# EAGLE board xplorer_b (EAGLE 6.3)
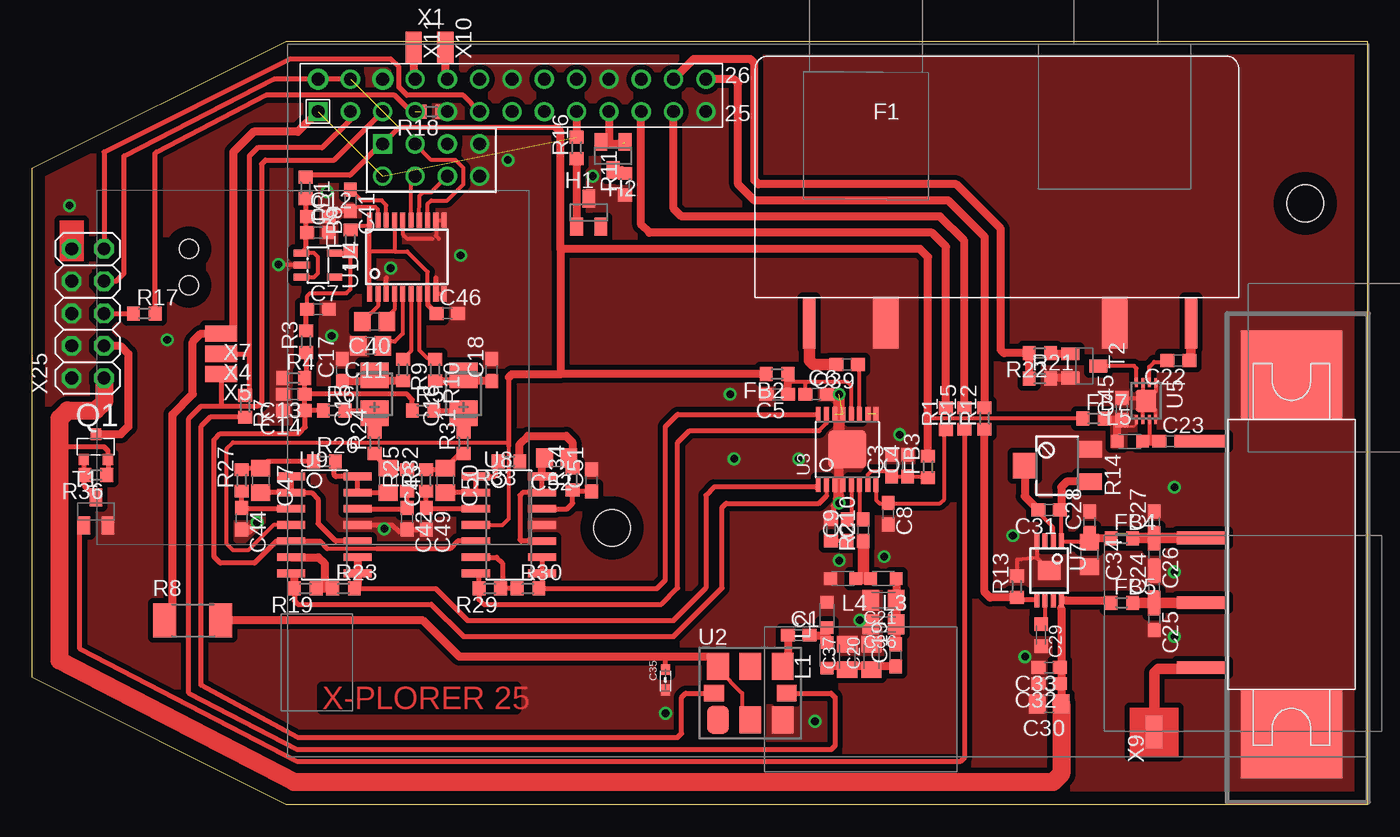
[diagram p0: board, top side]
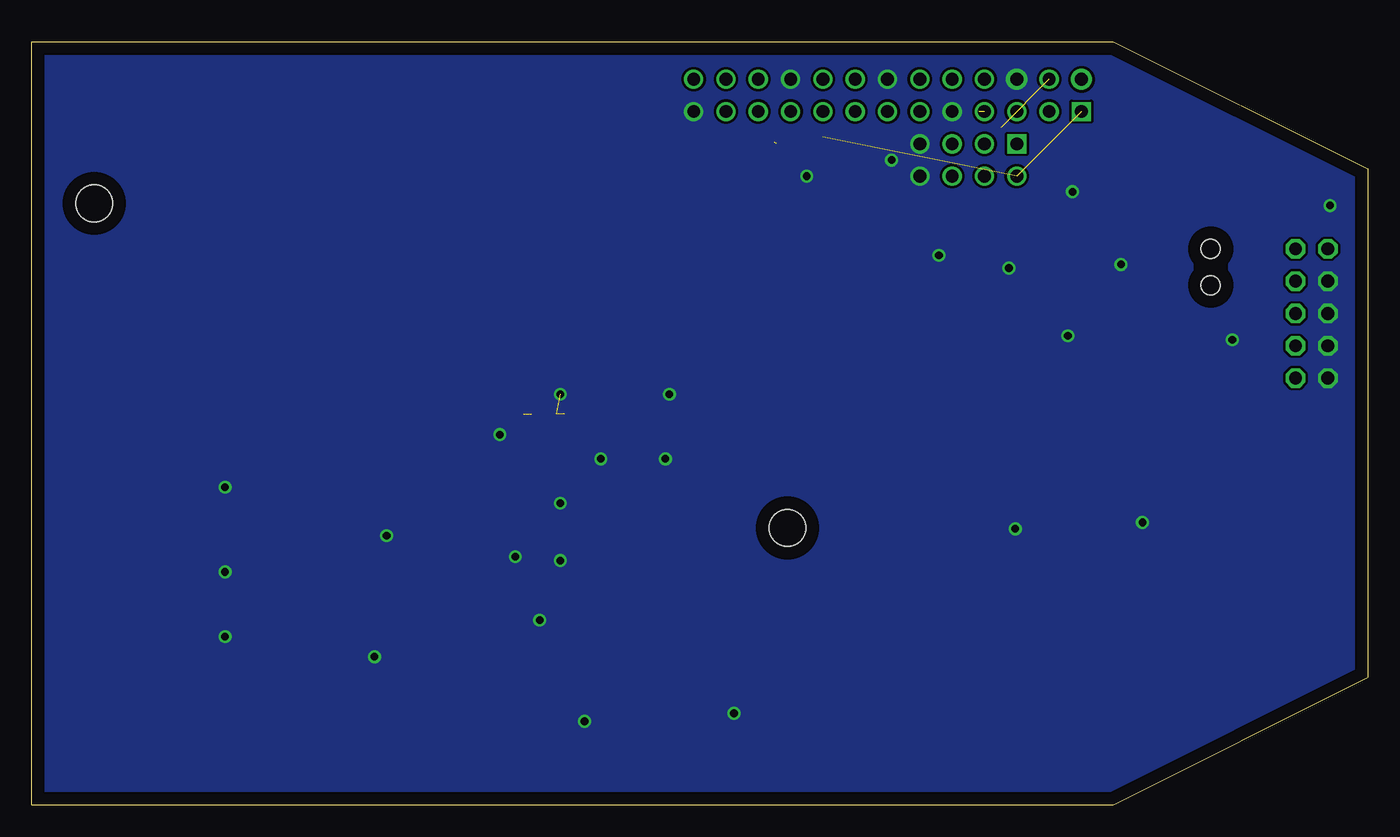
[diagram p1: board, bottom side, seen from below]

Size 105 x 60 mm. Coordinates in mm from the lower left corner, seen from the top.
Outline: 105,0 105,60 20,60 0,50 0,10 20,0 105,0
Copper layers (1*16): Top 0.035mm / dielectric 1.5mm / Bottom 0.035mm
Design rules "default": minimum track width 10mil, minimum drill 24mil, track to track 8mil, track to pad 8mil, pad to pad 8mil, via to via 8mil, smd to smd 8mil, copper to edge 40mil, drill to drill 8mil, minimum pad ring 10mil, minimum via ring 8mil, stop-mask expansion 4mil, vias tented up to drill 0mil, thermal gap 10mil
Holes 1.5 mm at 12.34,43.7 12.34,40.85

## Footprints (pad centres in the part's own frame; a part is rotated, then mirrored left to right if it is on the bottom)
C0603 = smd 1.1 x 1: 1 -0.85,0; 2 0.85,0
C0805 = smd 1.3 x 1.5: 1 -0.95,0; 2 0.95,0
CT3528 = smd 2 x 2.2: + -1.5,0; - 1.5,0
C0805K = smd 1.3 x 1.6: 1 -1,0; 2 1,0
C0603K = smd 1.05 x 1.08: 1 -0.875,0; 2 0.875,0
0603 = smd 0.85 x 0.7: 1 -0.9,0; 2 0.7,0
CBT13 = smd 4 x 1: A1 2,-15; A2 2,15 | smd 4 x 2: G0 2,-9; G1 2,9
R0603 = smd 1 x 1.1: 1 -0.85,0; 2 0.85,0
SOT23 = smd 1 x 1.4: 1 -0.95,-1.1; 2 0.95,-1.1; 3 0,1.1
L2012C = smd 1 x 1: 1 -1,0; 2 1,0
MICRO3 = smd 0.8 x 0.9: 1 -0.95,-1; 2 0.95,-1; 3 0,1
R2010 = smd 1.8 x 2.7: 1 -2.2,0; 2 2.2,0
SM-42/43X = smd 1.3 x 1.9: 1 -1.27,-2.55; 3 1.27,-2.55 | smd 2 x 1.9: 2 0,2.55
SOT23-BEC = smd 1 x 1.4: B -0.95,-1.1; C 0,1.1; E 0.95,-1.1
PW_R-PDSO-G20 = smd 0.4 x 1.2: 1 -2.925,-2.9; 2 -2.275,-2.9; 3 -1.625,-2.9; 4 -0.975,-2.9; 5 -0.325,-2.9; 6 0.325,-2.9; 7 0.975,-2.9; 8 1.625,-2.9; 9 2.275,-2.9; 10 2.925,-2.9; 11 2.925,2.9; 12 2.275,2.9; 13 1.625,2.9; 14 0.975,2.9; 15 0.325,2.9; 16 -0.325,2.9; 17 -0.975,2.9; 18 -1.625,2.9; 19 -2.275,2.9; 20 -2.925,2.9
8-PIN = smd 1.7 x 2.15: 1 -2.54,-2.1; 2 0,-2.1; 3 2.54,-2.1; 4 2.54,2.1; 5 0,2.1; 6 -2.54,2.1 | smd 1.545 x 1.3: 7 -2.853,0; 8 2.853,0
TSSOP16EXP = smd 0.381 x 1.143: 1 -2.275,-2.768; 2 -1.625,-2.768; 3 -0.975,-2.768; 4 -0.325,-2.768; 5 0.325,-2.768; 6 0.975,-2.768; 7 1.625,-2.768; 8 2.275,-2.768; 9 2.275,2.768; 10 1.625,2.768; 11 0.975,2.768; 12 0.325,2.768; 13 -0.325,2.768; 14 -0.975,2.768; 15 -1.625,2.768; 16 -2.275,2.768 | smd 3 x 3: EXP 0,0
SOT23-5 = smd 0.55 x 1.2: 1 -0.95,-1.3; 2 0,-1.3; 3 0.95,-1.3; 4 0.95,1.3; 5 -0.95,1.3
TDFN8-2X3MM = smd 0.7 x 0.3: 1 -1.45,0.75; 2 -1.45,0.25; 3 -1.45,-0.25; 4 -1.45,-0.75; 5 1.45,-0.75; 6 1.45,-0.25; 7 1.45,0.25; 8 1.45,0.75 | smd 1.74 x 1.63: EP 0,0
RA08H1317M = smd 7 x 8: G1 -14.1,0; G2 14.1,0 | smd 1 x 4: IN -8.9,-7; OUT 8.9,-7; VDD 3.8,-7; VGG -1.3,-7
PW_R-PDSO-G08 = smd 0.4 x 1.2: 1 -0.975,-2.3; 2 -0.325,-2.3; 3 0.325,-2.3; 4 0.975,-2.3; 5 0.975,2.3; 6 0.325,2.3; 7 -0.325,2.3; 8 -0.975,2.3 | smd 1.8 x 1.5: EP 0,0
SO14 = smd 0.61 x 2.21: 1 -3.81,-2.603; 2 -2.54,-2.603; 3 -1.27,-2.603; 4 0,-2.603; 5 1.27,-2.603; 6 2.54,-2.603; 7 3.81,-2.603; 8 3.81,2.603; 9 2.54,2.603; 10 1.27,2.603; 11 0,2.603; 12 -1.27,2.603; 13 -2.54,2.603; 14 -3.81,2.603
RASPBERRY-PI_REV2 = drill 1 square: P1_1 0,0; P5_1 5.08,-2.54 | drill 1 pad 1.676: P1_2 0,2.54; P1_6 5.08,2.54 | drill 1: P1_3 2.54,0; P1_4 2.54,2.54; P1_5 5.08,0; P1_7 7.62,0; P1_8 7.62,2.54; P1_9 10.16,0; P1_10 10.16,2.54; P1_11 12.7,0; P1_12 12.7,2.54; P1_13 15.24,0; P1_14 15.24,2.54; P1_15 17.78,0; P1_16 17.78,2.54; P1_17 20.32,0; P1_18 20.32,2.54; P1_19 22.86,0; P1_20 22.86,2.54; P1_21 25.4,0; P1_22 25.4,2.54; P1_23 27.94,0; P1_24 27.94,2.54; P1_25 30.48,0; P1_26 30.48,2.54; P5_2 5.08,-5.08; P5_3 7.62,-2.54; P5_4 7.62,-5.08; P5_5 10.16,-2.54; P5_6 10.16,-5.08; P5_7 12.7,-2.54; P5_8 12.7,-5.08 | hole 2.9: 77.6,-7.225; 23.1,-32.725
SMD1,27-2,54 = smd 1.27 x 2.54: 1 0,0
2X05 = drill 1.016 octagon: 1 -5.08,-1.27; 2 -5.08,1.27; 3 -2.54,-1.27; 4 -2.54,1.27; 5 0,-1.27; 6 0,1.27; 7 2.54,-1.27; 8 2.54,1.27; 9 5.08,-1.27; 10 5.08,1.27

## Placement (x,y rotation side)
C1  10n  [C0603]  60.27,13.34 0 top
C2  100n  [C0603]  22.5,44.98 0 top
C3  10n  [C0603]  67.58,26.67 90 top
C4  100p  [C0603]  68.85,26.67 90 top
C5  10n  [C0603]  58.59,32.27 180 top
C6  100p  [C0603]  61.66,32.28 0 top
C7  100n  [C0603]  22.5,38.94 0 top
C8  100n  [C0603]  67.31,22.88 270 top
C9  10n  [C0603]  64.09,21.59 90 top
C10  10n  [C0603]  65.35,21.59 90 top
C11  10u  [C0805]  26.63,36.09 180 top
C12  1u  [C0603]  22.5,46.24 0 top
C13  100n  [C0603]  20.59,32.27 180 top
C14  10u  [C0603]  20.59,31 180 top
C15  1u  [CT3528]  26.95,32.27 90 top
C16  1u  [CT3528]  33.93,32.27 90 top
C17  10n  [C0603]  24.41,34.18 90 top
C18  10n  [C0603]  36.15,34.18 90 top
C19  4p7  [C0603]  67.9,11.75 90 top
C20  47p  [C0805K]  66,11.64 90 top
C21  47p  [C0805K]  66.95,16.08 180 top
C22  10n  [C0603]  90.12,34.92 180 top
C23  10n  [C0603]  89.48,28.57 0 top
C24  100p  [C0603]  88.22,17.15 90 top
C25  10n  [C0603]  88.22,14.6 270 top
C26  100p  [C0603]  88.22,19.69 270 top
C27  10n  [C0603]  88.22,22.23 90 top
C28  100n  [C0603]  83.13,22.23 90 top
C29  10n  [C0603K]  79.33,13.34 270 top
C30  10u  [C0805]  79.96,7.94 180 top
C31  10n  [C0603]  79.96,23.18 180 top
C32  100n  [C0603]  79.96,9.52 180 top
C33  100p  [C0603]  79.96,10.8 180 top
C34  10u  [C0805]  83.13,19.69 270 top
C35  100n  [0603]  49.8,9.73 270 top
C36  8p  [C0805K]  66.95,14.18 180 top
C37  8p  [C0805K]  64.09,11.64 90 top
C39  10n  [C0603]  64.09,34.61 180 top
C40  10u  [C0805]  26.95,37.99 180 top
C41  100n  [C0603]  25.04,47.52 270 top
C42  100p  [C0603]  29.5,22.5 270 top
C43  200p  [C0805]  28,25.5 270 top
C44  100p  [C0603]  16.5,22.5 270 top
C45  100n  [C0603]  85.67,31.11 90 top
C46  100n  [C0603]  32.66,38.62 0 top
C47  200p  [C0805]  18,25.5 270 top
C49  100p  [C0603]  31,22.5 270 top
C50  200p  [C0805]  32.5,25.5 270 top
C51  100p  [C0603]  44,25.5 90 top
C52  200p  [C0805]  41.25,27.25 180 top
F1  HELIX  [CBT13]  76.11,39.87 270 top
FB1  [R0603]  21.52,48.5 270 top
FB2  [R0603]  58.59,33.86 180 top
FB3  [R0603]  70.44,26.56 90 top
FB4  [R0603]  85.67,20.95 0 top
FB5  [R0603]  85.67,15.88 0 top
FB7  [R0603]  83.46,30.37 0 top
FB8  [R0603]  25.04,44.34 90 top
H1  [SOT23]  43.77,46.56 0 top
H2  [SOT23]  45.68,51.01 180 top
L1  15n  [L2012C]  62.5,11.75 90 top
L2  9n1  [L2012C]  62.5,14.92 90 top
L3  15n  [L2012C]  66.94,17.78 180 top
L4  9n1  [L2012C]  63.77,17.78 180 top
L5  220n  [L2012C]  86.31,28.57 0 top
Q1  IRLML6402  [MICRO3]  5.04,28.15 0 top
R1  1k  [R0603]  71.86,30.35 90 top
R2  50R  [R0603]  62.81,21.59 270 top
R3  10k  [R0603]  21.55,36.4 90 top
R4  2k7  [R0603]  20.59,33.55 0 top
R5  10k  [R0603]  30.76,31 0 top
R6  10k  [R0603]  23.77,31 0 top
R7  [R0603]  16.79,31.32 270 top
R8  [R2010]  12.66,14.49 0 top
R9  475R  [R0603]  29.17,34.18 270 top
R10  475R  [R0603]  31.71,34.18 270 top
R11  475R  [R0603]  46.63,48.78 90 top
R12  [R0603]  74.89,30.37 90 top
R13  10k  [R0603]  77.42,17.15 90 top
R14  [SM-42/43X]  80.59,26.67 90 top
R15  8k8  [R0603]  73.3,30.37 90 top
R16  475R  [R0603]  42.82,51.64 90 top
R17  475R  [R0603]  8.85,38.62 0 top
R18  1k  [R0603]  31.39,54.5 180 top
R19  10k  [R0603]  21.5,17 180 top
R21  47k  [R0603]  79.23,33.5 0 top
R22  10k  [R0603]  79.23,35.5 180 top
R23  10k  [R0603]  24.5,17 0 top
R24  47k  [R0603]  26.95,28.46 90 top
R25  47k  [R0603]  29.5,25.5 90 top
R26  47k  [R0603]  23,27 0 top
R27  47k  [R0603]  16.5,25.5 90 top
R29  10k  [R0603]  36,17 180 top
R30  10k  [R0603]  39,17 0 top
R31  47k  [R0603]  33.93,28.46 90 top
R32  47k  [R0603]  31,25.5 90 top
R33  47k  [R0603]  37.5,27 180 top
R34  47k  [R0603]  42.5,25.61 90 top
R36  47k  [R0603]  5.04,25.93 180 top
T1  [SOT23-BEC]  5.04,23.07 0 top
T2  BC817  [SOT23-BEC]  82.73,34.5 270 top
U1  PCM5102APW  [PW_R-PDSO-G20]  29.48,43.07 0 top
U2  SI570  [8-PIN]  56.47,8.78 0 top
U3  AD8345  [TSSOP16EXP]  64.09,27.94 0 top
U4  MIC5233  [SOT23-5]  22.5,42.44 270 top
U5  MAX2614  [TDFN8-2X3MM]  87.58,31.75 270 top
U6  RA08H1317M  [RA08H1317M]  99.01,19.69 270 top
U7  TPS7A4901  [PW_R-PDSO-G08]  79.96,18.41 180 top
U8  MAX4478  [SO14]  37.5,22 270 top
U9  MAX4478  [SO14]  23,22 270 top
X1  RASPBERRY-PI_REV2  [RASPBERRY-PI_REV2]  22.5,54.5 0 top
X4  [SMD1,27-2,54]  14.88,35.45 90 top
X5  [SMD1,27-2,54]  14.88,33.86 90 top
X7  [SMD1,27-2,54]  14.88,37.04 90 top
X9  [SMD1,27-2,54]  88.22,5.72 0 top
X10  [SMD1,27-2,54]  32.5,59.5 180 top
X11  [SMD1,27-2,54]  30,59.5 180 top
X25  [2X05]  4.4,38.62 90 top

## Library data of the parts
C1-C34 C36 C37 C39-C47 C49-C52 L1-L5 R1-R13 R15-R19 R21-R27 R29-R34 R36 = rcl
C35 = RC
F1 = 272MT-1008A
FB1-FB5 FB7 FB8 = FB
H1 H2 = led
Q1 = transistor-power
R14 = pot
T1 = transistor
T2 = transistor-npn
U1 = PCM5102A
U2 = silabs; OC_FARNELL: unknown; OC_NEWARK: unknown
U3 = AD8345
U4 = v-reg-micrel; OC_FARNELL: unknown; OC_NEWARK: unknown
U5 = MAX2615
U6 = RA08H1317M
U7 = TPS7A4901
U8 U9 = burr-brown; MF: TEXAS INSTRUMENTS; MPN: OPA4132UA; OC_FARNELL: 1212302; OC_NEWARK: 80K6028
X1 = RaspberryPi_v2
X4 X5 X7 X9-X11 = wirepad
X25 = pinhead

## Nets
12V_F: C2.1 C12.1 FB1.2 U4.1 U4.3
$2345: C16.+ R5.2 R31.2
$123456: C15.+ R6.2 R24.2
+3V3: R8.1 R16.2 X1.P1_1 X1.P1_17 X1.P5_2 X7.1
+3V3_PCM: C46.1 FB8.2 U1.1 U1.8 U1.17 U1.20
+3V3A: C7.1 FB8.1 R3.2 U4.5
+5V: FB1.1 FB2.2 FB3.2 FB7.1 U8.4 U9.4 X1.P1_2 X1.P1_4 X1.P5_1 X25.7
+5V_MAX: C45.1 FB7.2 L5.1 U5.5
+12V: C30.1 C32.1 C33.1 FB5.1 Q1.2 R36.1 U7.8 X25.1
BB_I+: R23.2 U3.1 U9.8 U9.9
BB_I-: R19.2 U3.2 U9.7
BB_Q+: R30.2 U3.16 U8.8 U8.9
BB_Q-: R29.2 U3.15 U8.7
CLEAN_LO: C10.1 L3.2 L4.1
GND: C2.2 C3.2 C4.2 C5.2 C6.2 C7.2 C8.2 C11.2 C12.2 C13.2 C14.2 C17.2 C18.2 C20.2 C21.2 C24.2 C25.2 C26.2 C27.2 C28.2 C29.2 C30.2 C32.2 C33.2 C34.2 C35.2 C36.2 C37.2 C41.2 C42.2 C44.2 C45.2 C46.2 C49.2 C51.2 F1.G0 F1.G1 H1.3 L2.2 L4.2 R2.1 R4.1 R11.1 R13.2 R14.3 R18.1 R21.2 T1.E T2.E U1.3 U1.9 U1.10 U1.11 U1.12 U1.16 U1.19 U2.3 U3.3 U3.4 U3.9 U3.10 U3.13 U3.14 U3.EXP U4.2 U5.1 U5.3 U5.6 U5.8 U5.EP U6.G1 U6.G2 U7.4 U7.EP U8.11 U9.11 X1.P1_6 X1.P1_9 X1.P1_14 X1.P1_20 X1.P1_25 X1.P5_7 X1.P5_8 X25.2 X25.4 X25.6 X25.8
HEAD: R17.1 X25.5
LO: C1.1 U2.4
MOD_EN: R1.2 X1.P1_21
N$1: C39.2 F1.A1
N$2: C10.2 U3.6
N$3: C3.1 C4.1 FB3.1 U3.7
N$4: C5.1 C6.1 FB2.1 U3.12
N$5: C8.1 R1.1 U3.8
N$6: C9.2 U3.5
N$7: C9.1 R2.2
N$8: C39.1 U3.11
N$9: C49.1 R32.1 U8.3
N$10: R10.1 U1.7
N$11: C16.- C18.1 R10.2
N$12: R9.1 U1.6
N$13: R7.2 U2.7
N$14: C19.2 C21.1 C36.1 L3.1
N$15: C22.1 F1.A2
N$16: H2.3 R11.2
N$17: C1.2 L1.2 L2.1
N$18: H1.1 R16.1
N$19: C35.1 R8.2 U2.2 U2.6
N$20: C22.2 U5.2
N$21: C23.1 L5.2 U5.7
N$22: C23.2 U6.IN
N$23: C24.1 C25.1 FB5.2 U6.VDD
N$24: C26.1 C27.1 FB4.2 U6.VGG
N$25: R12.1 R13.1 U7.5
N$26: U6.OUT X9.1
N$27: R17.2 R18.2 X1.P1_7
N$28: C31.2 R14.2 U7.2
N$29: X1.P1_10 X10.1
N$32: C50.1 R31.1 R32.2
N$33: C11.1 U1.5
N$34: C40.1 U1.4
N$35: C40.2 U1.2
N$36: C41.1 U1.18
N$37: C52.2 U8.10 U8.13 U8.14
N$38: C51.1 R34.1 U8.12
N$39: C52.1 R33.1 R34.2
N$40: T2.C U5.4
N$41: R22.1 T2.B
N$42: R15.1 T1.B
N$43: C42.1 R25.1 U9.12
N$44: C29.1 U7.6
N$46: C43.1 R24.1 R25.2
N$47: C47.2 U9.1 U9.2 U9.10
N$48: C44.1 R27.1 U9.3
N$49: C47.1 R26.1 R27.2
N$50: C43.2 R26.2 U9.13 U9.14
N$51: C50.2 R33.2 U8.1 U8.2
N$52: R19.1 R23.1 U9.6
N$53: R29.1 R30.1 U8.6
N$54: Q1.1 R36.2 T1.C
N$57: X1.P1_8 X11.1
N$64: C15.- C17.1 R9.2
N$66: R15.2 X1.P1_23
PA_EN: R12.2 X1.P1_26
PCM_CLK: U1.13 X1.P5_3
PCM_DOUT: U1.14 X1.P5_6
PCM_FS: U1.15 X1.P5_4
PRE_EN: R21.1 R22.2 X1.P1_24
REL: Q1.3 X25.3
REL_FB: X1.P1_11 X25.9
SCL: U2.8 X1.P1_5 X5.1
SDA: R7.1 X1.P1_3 X4.1
STAT: H2.1 X1.P1_19
VGG: C28.1 C31.1 C34.1 FB4.1 R14.1 U7.1
VGND: C13.1 C14.1 R3.1 R4.2 R5.1 R6.1 U8.5 U9.5
VLA: C19.1 C20.1 C37.1 L1.1

## Tracks (layer width: path | path; a pad name or v marks a point on that pad's centre or on a via)
12V_F
  Top 0.305: U4.3 22.18,41.48 22.5,41.8 22.5,43.07 22.18,43.39 U4.1
  Top 0.406: FB1.2 21.52,46.5 | 21.52,46.5 21.52,44.5 | 21.52,44.5 21.52,43.7 U4.1 | C2.1 21.65,44.63 21.52,44.5 | C12.1 21.65,46.37 21.52,46.5
$2345
  Top 0.406: R5.2 33.52,31 C16.+ R31.2
$123456
  Top 0.406: R6.2 26.71,31 C15.+ R24.2
+3V3  (2 unrouted)
  Top 0.61: X1.P1_1 20.91,52.91 17.42,52.91 15.83,51.33 15.83,37.04 X7.1 13.29,37.04 12.66,36.4 12.66,32.27 11.07,30.69 11.07,15.45 10.46,14.84 R8.1 | X1.P1_17 R16.2
+3V3_PCM
  Top 0.305: U1.17 28.51,43.51 28.5,43.5 | U1.8 31.11,41.89 29.5,43.5 28.5,43.5 | U1.1 26.56,43.39 26.56,43.5 | 26.56,43.5 U1.20 26.56,45.56 26.5,45.5 25.35,45.5 FB8.2 | 28.5,43.5 26.56,43.5
  Top 0.406: U1.8 31.11,39.33 C46.1
+3V3A
  Top 0.305: C7.1 21.65,40 21.86,40.21 24.72,40.21 25.04,40.53 FB8.1
  Top 0.406: U4.5 24.93,43.38 FB8.1 | R3.2 21.55,38.84 C7.1
+5V  (1 unrouted)
  Top 0.305: U8.4 37,22 37.5,22.5 37.5,28.23 | U9.4 19,22 17,20 15.82,20 15.32,20.5 15.32,28 15.82,28.5 37.5,28.5 | FB7.1 70.44,30.37
  Top 0.406: X1.P1_2 X1.P1_4 19.01,57.04 7.26,51.01 7.26,41.8 6.62,41.16 X25.7 | FB1.1 21.66,49.5 25,49.5 27.46,51.96 X1.P5_1 28.85,53.23 41.23,53.23 | 37.5,28.23 37.5,28.5 37.5,33.62 | 41.56,33.86 41.55,33.86
  Top 0.61: FB3.2 70.44,30.37 70.44,43.07 69.81,43.7 41.55,43.7 | 41.55,43.7 41.55,33.86 37.74,33.86 37.5,33.62 | FB2.2 41.56,33.86 | 41.55,43.7 41.55,52.91 41.23,53.23
+5V_MAX
  Top 0.203: U5.5 86.83,29.93 86.64,29.73 85.68,29.73 85.68,30.26 C45.1
  Top 0.61: FB7.2 84.41,30.27 C45.1 85.31,29.9 L5.1
  pour Top (no thermals): 84.89,30.85 84.89,28.15 86,28.15 86,29.42 86.79,29.42 86.79,30.53 86.16,30.53 86.16,30.85
+12V
  Top 0.305: 80.92,15.45 80.94,15.46 U7.8 81.2,16.12 81.24,16.08 | 2.5,28.15 2.18,27.83
  Top 0.406: R36.1 5.99,26.02 Q1.2 5.99,27.83 5.67,28.15 2.5,28.15
  Top 0.61: 80.92,15.45 80.92,11 | 80.92,11 80.92,9.1 | 80.92,9.1 C30.1 | C32.1 80.81,9.21 80.92,9.1 | C33.1 80.81,10.89 80.92,11 | 81.24,16.08 84.62,16.08 FB5.1
  Top 1.422: C30.1 80.92,2.43 80.28,1.8 20.59,1.8 2.18,11.32 2.18,27.83 2.18,30.37 2.82,31 5.04,31 5.67,31.64 X25.1
BB_I+
  Top 0.305: U3.1 61.61,24.97
  Top 0.406: R23.2 31.74,17 34.25,14.49 50.44,14.49 52.98,17.03 52.98,24.34 53.61,24.97 61.61,24.97
  Top 0.61: U9.9 U9.8 25.6,17.25 R23.2
BB_I-
  Top 0.305: U3.2 62.46,24.29
  Top 0.406: R19.2 20.65,16.03 20.91,15.77 31.39,15.77 33.93,13.23 50.44,13.23 54.25,17.03 54.25,23.39 54.57,23.7 61.87,23.7 62.46,24.29
  Top 0.61: R19.2 20.65,17.94 U9.7
BB_Q+
  Top 0.305: 50.78,30.71 50.76,30.69 | U3.16 61.57,30.71 61.55,30.69
  Top 0.406: U3.16 61.79,30.69 50.76,30.69 49.8,29.73 49.8,17.67 49.14,17 R30.2 40.1,17.25 U8.8 U8.9
BB_Q-
  Top 0.305: U3.15 62.46,30.01 61.87,29.42
  Top 0.406: 61.87,29.42 51.71,29.42 50.76,28.46 50.76,17.03 49.49,15.77 35.52,15.77 35.15,16.13 R29.2 35.15,17.94 U8.7
CLEAN_LO
  Top 0.889: L4.1 65.36,17.78 | 65.36,17.78 L3.2 | C10.1 65.35,17.79 65.36,17.78
GND  (via drill 0.6)  (3 unrouted)
  Top 0.305: U5.3 87.33,32.27 | 87.33,32.27 87.33,32 U5.EP | U5.1 88.33,32.5 U5.EP | C45.2 87.02,31.96 87.33,32.27 | U5.6 87.33,31.5 U5.EP | U5.8 88.33,31 U5.EP | U7.4 78.98,19.39 | 78.98,19.39 U7.EP | U1.19 27.21,46.79 27,47 25.38,47 C41.2 | U1.16 29.16,44.84 29.5,44.5 31.5,44.5 | U1.11 U1.12 31.76,44.74 32,44.5 | U1.10 U1.9 | U3.4 U3.3 63.11,24.05 v63.46,23.7 | U4.2 20.07,42.44 20,42.5 | 78.98,19.39 77.43,19.26 R13.2
  Top 0.406: U1.3 27.86,41.45 | U1.9 31.76,41.43 | U9.11 28.33,22 28.85,21.48 29.33,21.48 C42.2 C49.2 | v63.46,23.7 63.2,23.7 63,23.5 63,22.5 62.5,22.5 | C41.2 23.77,46.66 C12.2
  Top 0.61: T2.E 80.13,33.55 R21.2 | v17.7,22.2 17,21.5 16.65,21.5 C44.2
  Top 0.762: U3.EXP 64.09,27.5 63.46,26.88 v63.46,23.7
  Top 0.889: U3.EXP 64.09,28.47 63.46,29.1 v63.46,32.27
  other vias: 60.28,27.2 55.2,27.2 68.22,29.1 67,19.5 27.7,21.7 2.95,47.12 28.2,42.2 33.7,43.2 23.57,36.88 63.46,19.2 65.09,14.52 23.2,48.2 10.64,36.56 78.06,11.64 54.88,32.27 61.55,6.56 49.8,7.19 77.11,21.16 89.81,24.97 89.81,18.3 89.81,13.23 19.39,42.48 37.42,50.69 44.09,49.42
  pour Bottom (no thermals): 0,50 20,60 105,60 105,0 20,0 0,10
  pour Top (isolate 0.406, no thermals): 0,50 20,60 105,60 105,0 20,0 0,10
HEAD
  Top 0.406: X25.5 R17.1
LO
  Top 0.61: C1.1 59.42,11.29 U2.4
MOD_EN
  Top 0.61: R1.2 71.86,43.87 70.76,44.98 48.53,44.98 47.9,45.61 X1.P1_21
N$1
  Top 0.889: C39.2 61.44,34.61 61.11,34.94 F1.A1
N$2
  Top 0.305: U3.6 65.06,22.73 C10.2
N$3
  Top 0.305: FB3.1 70.44,25.82 C4.1 C3.1 67.05,26.24 66,26.24 65.71,25.95 U3.7
N$4
  Top 0.305: U3.12 64.41,32.91 64.09,33.23 60.92,33.23 | 60.92,33.23 59.33,33.23 59.33,33.75 FB2.1 | C6.1 60.81,33.12 60.92,33.23
  Top 0.61: C5.1 FB2.1
N$5
  Top 0.305: U3.8 66.36,23.98 66.63,23.7 67.27,23.7 | C8.1 67.27,23.7 | 67.27,23.7 71.4,23.7 71.71,24.02 71.71,29.35 R1.1
N$6
  Top 0.305: U3.5 64.41,22.77 C9.2
N$7
  Top 0.305: C9.1 R2.2
N$8
  Top 0.305: U3.11 65.06,34.48 C39.1
N$9
  Top 0.406: R32.1 C49.1 31.08,23.27 U8.3
N$10
  Top 0.305: U1.7 30.46,35.75 31.07,35.13 31.61,35.13 R10.1
N$11
  Top 0.61: R10.2 33.93,33.33 C16.- 33.93,33.86 33.3,33.86 33.3,33.33 C18.1
N$12
  Top 0.305: U1.6 29.81,35.67 R9.1
N$13
  Top 0.406: R7.2 14.03,30.47 13.29,29.73 13.29,9.41 20.91,5.29 50.76,5.29 51.08,5.6 51.08,8.46 51.39,8.78 U2.7
N$14
  Top 0.61: L3.1 C21.1 C36.1 67.95,12.65 C19.2
N$15
  Top 0.762: F1.A2 91.11,35.06 C22.1
N$16
  Top 0.61: H2.3 46.36,49.91 R11.2
N$17
  Top 0.61: L2.1 L1.2 62.5,13.22 62.51,13.23 62.4,13.34 C1.2
N$18
  Top 0.61: R16.1 H1.1
N$19
  Top 0.305: U2.6 53.93,10.69 55.84,8.78 55.84,7.31 U2.2
  Top 0.406: C35.1 49.8,11.64
  Top 0.61: U2.6 53.93,11 53.3,11.64 49.8,11.64 33.61,11.64 30.76,14.49 R8.2 14.56,14.49
N$20
  Top 0.305: U5.2 87.83,34.42 88.22,34.81 89.16,34.81 C22.2
N$21
  Top 0.305: U5.7 87.83,28.86 87.91,28.78
  Top 0.61: L5.2 87.91,28.57 | 87.91,28.57 C23.1 | 87.83,28.86 87.83,28.65 87.91,28.57
N$22
  Top 0.61: U6.IN 90.34,28.59 C23.2
N$23
  Top 0.813: U6.VDD 87.91,15.88 | 87.91,15.88 86.53,15.88 FB5.2 | C25.1 C24.1 88.22,16.2 87.91,15.88
N$24
  Top 0.813: U6.VGG 88.22,20.98 | 88.22,20.98 86.56,20.98 FB4.2 | 88.22,20.98 88.22,21.48 88.22,21.47 C27.1 88.22,20.99 88.22,20.98 | 88.22,20.98 C26.1
N$25
  Top 0.406: U7.5 77.6,16.12 R13.1
  Top 0.61: R13.1 75.31,16.3 74.89,16.72 R12.1
N$26
  Top 0.813: X9.1 88.22,10.36 88.54,10.69 91.91,10.69 U6.OUT
N$27  (1 unrouted)
  Top 0.406: X1.P1_7 29.8,54.5 28.53,55.77 18.37,55.77 9.8,51.33 9.7,51.22 R17.2
N$28
  Top 0.305: U7.2 80.28,21.8 79.11,22.97 C31.2
  Top 0.61: R14.2 78.05,24.24 C31.2
N$29
  Top 0.61: X10.1 32.5,57.2 X1.P1_10
N$32
  Top 0.406: R32.2 32.4,26.35 C50.1 33.66,27.61 R31.1
N$33
  Top 0.305: U1.5 29.16,37.03 28.53,36.4 27.89,36.4 C11.1
N$34
  Top 0.305: U1.4 28.51,38.92 28.21,38.62 28.21,38.31 C40.1
N$35
  Top 0.305: U1.2 27.21,39.21 26.63,38.62 C40.2
N$36
  Top 0.305: U1.18 27.86,47.14 27.5,47.5 25.91,47.5 C41.1
N$37
  Top 0.406: U8.14 U8.13 38.58,24.54 38.38,24.34 38.38,20.84 38.49,20.73 U8.10
  Top 0.61: U8.14 40.1,27.05 C52.2
N$38
  Top 0.406: U8.12 42.07,23.27 42.5,23.7 R34.1 42.61,24.65 C51.1
N$39
  Top 0.61: R33.1 38.35,28.35 39,29 42,29 42.5,28.5 R34.2 42.5,26.95 C52.1
N$40
  Top 0.305: U5.4 86.83,34.3 86.64,34.5 T2.C
N$41
  Top 0.61: T2.B 80.13,35.45 R22.1
N$42
  Top 0.406: R15.1 73.3,3.7 72.98,3.38 20.91,3.38 3.77,12.27 3.77,21.65 T1.B
N$43
  Top 0.406: U9.12 29.42,23.27 C42.1 R25.1
N$44
  Top 0.305: U7.6 79.63,14.52 C29.1
N$46
  Top 0.406: R24.1 27.3,27.15 C43.1 29.4,26.45 R25.2
N$47
  Top 0.406: U9.2 C47.2 | U9.1 U9.2 | U9.10 23.89,20.73 22.5,22.12 22.5,24.02 21.98,24.54 U9.2
N$48
  Top 0.406: R27.1 C44.1 16.58,23.27 U9.3
N$49
  Top 0.406: R27.2 16.6,26.45 C47.1 18.55,27 R26.1
N$50
  Top 0.406: R26.2 23.77,26.92 23.77,25.93 23.89,25.81 U9.14 U9.13 C43.2
N$51
  Top 0.406: C50.2 32.39,24.66 32.02,24.66 32.14,24.54 U8.2 U8.1 36.36,25.81 36.47,25.93 36.47,26.82 R33.2
N$52
  Top 0.61: U9.6 22.54,19.46 23,19 23,17 | 23,17 R19.1 | R23.1 23,17
N$53
  Top 0.406: U8.6 36.54,19.46 37,19 37,17.15 R29.1 R30.1
N$54
  Top 0.406: Q1.1 4.09,25.93 | 4.09,25.93 4.09,25.12 T1.C | R36.2 4.09,25.93
N$57
  Top 0.61: X11.1 30,57.16 X1.P1_8
N$64
  Top 0.61: C17.1 26.95,33.33 | R9.2 26.95,33.33 | 26.95,33.33 C15.-
N$66
  Top 0.61: R15.2 73.3,44.34 71.4,46.24 51.08,46.24 50.44,46.88 X1.P1_23
PA_EN
  Top 0.61: X1.P1_26 55.2,57.04 55.52,56.72 55.52,48.78 56.79,47.52 72.03,47.52 74.89,44.66 R12.2
PCM_CLK
  Top 0.305: U1.13 31.12,47.25 31.39,47.52 32.66,47.52 33.93,48.78 33.93,50.05 33.3,50.69 31.39,50.69 X1.P5_3
PCM_DOUT
  Top 0.305: U1.14 30.48,47.87 30.76,48.15 31.39,48.15 X1.P5_6
PCM_FS
  Top 0.305: U1.15 29.82,49.12 X1.P5_4
PRE_EN
  Top 0.61: R21.1 R22.2 76.42,35.5 76.16,35.77 76.16,45.29 72.66,48.78 57.11,48.78 56.79,49.1 56.79,58.31 56.47,58.63 52.03,58.63 X1.P1_24
REL
  Top 0.61: X25.3 6.94,36.09 7.58,35.45 7.58,29.73 6.99,29.15 Q1.3
REL_FB
  Top 0.406: X1.P1_11 33.93,55.77 29.48,55.77 28.85,56.41 28.85,57.99 28.21,58.63 20.28,58.63 5.67,51.33 X25.9
SCL
  Top 0.406: X1.P1_5 23.77,50.69 18.37,50.69 18.05,50.37 18.05,31.64 17.74,31.32 14.88,31.32 | 14.88,31.32 13.29,31.32 12.34,30.37 12.34,8.78 20.91,4.34 62.82,4.34 63.14,4.65 63.14,8.46 62.82,8.78 U2.8 | X5.1 14.88,31.32
SDA
  Top 0.406: X1.P1_3 25.04,53.87 22.82,51.64 17.74,51.64 17.1,51.01 17.1,35.45 | 14.56,35.45 X4.1 17.1,35.45 | 17.1,35.45 17.1,32.49 R7.1
STAT  (1 unrouted)
  Top 0.61: X1.P1_19 45.36,51.96 46.48,51.96
VGG
  Top 0.305: C34.1 83.06,20.72 U7.1 80.94,22.73 C31.1
  Top 0.61: R14.1 81.35,25.4 80.92,24.97 80.92,22.97 C31.1 | FB4.1 83.56,20.95 | 83.56,20.95 C28.1 | 83.56,20.95 C34.1
VGND
  Top 0.305: 27.12,20.12 23.25,20.12
  Top 0.406: R5.1 29.91,31.86 29.48,32.27 C13.1 | R6.1 C14.1 | C14.1 C13.1 | C13.1 R4.2 21.55,33.65 R3.1 | U8.5 33.48,20.73 32.88,20.12 27.12,20.12 | 23.25,20.12 22.64,20.73 U9.5 19.23,20.73 17.5,19 14.82,19 14.32,19.5 14.32,28.68 14.82,29.18 21,29.18 21.5,29.68 21.5,30.95 C14.1
VLA
  Top 0.61: C19.1 66.31,10.9 | 66.31,10.9 64.09,10.9 | 64.09,10.9 62.65,10.9 L1.1 | C37.1 64.09,10.9 | C20.1 66.06,10.64 66.31,10.9
(copper drawn outside any net)
  shapes: Top area x2

## Text on the board
Top: X-PLORER 25